# Altium PCB AD_STM32-PCB.PcbDoc
Units mm, origin at the board's own origin, x right, y up, seen from the top; angles counter-clockwise.
Board outline 43.8 x 30.7 mm, 2 copper layers (Top Layer, Bottom Layer), stack 1.671 mm thick; 30 components, 26 nets, 139 pads, 34 vias.
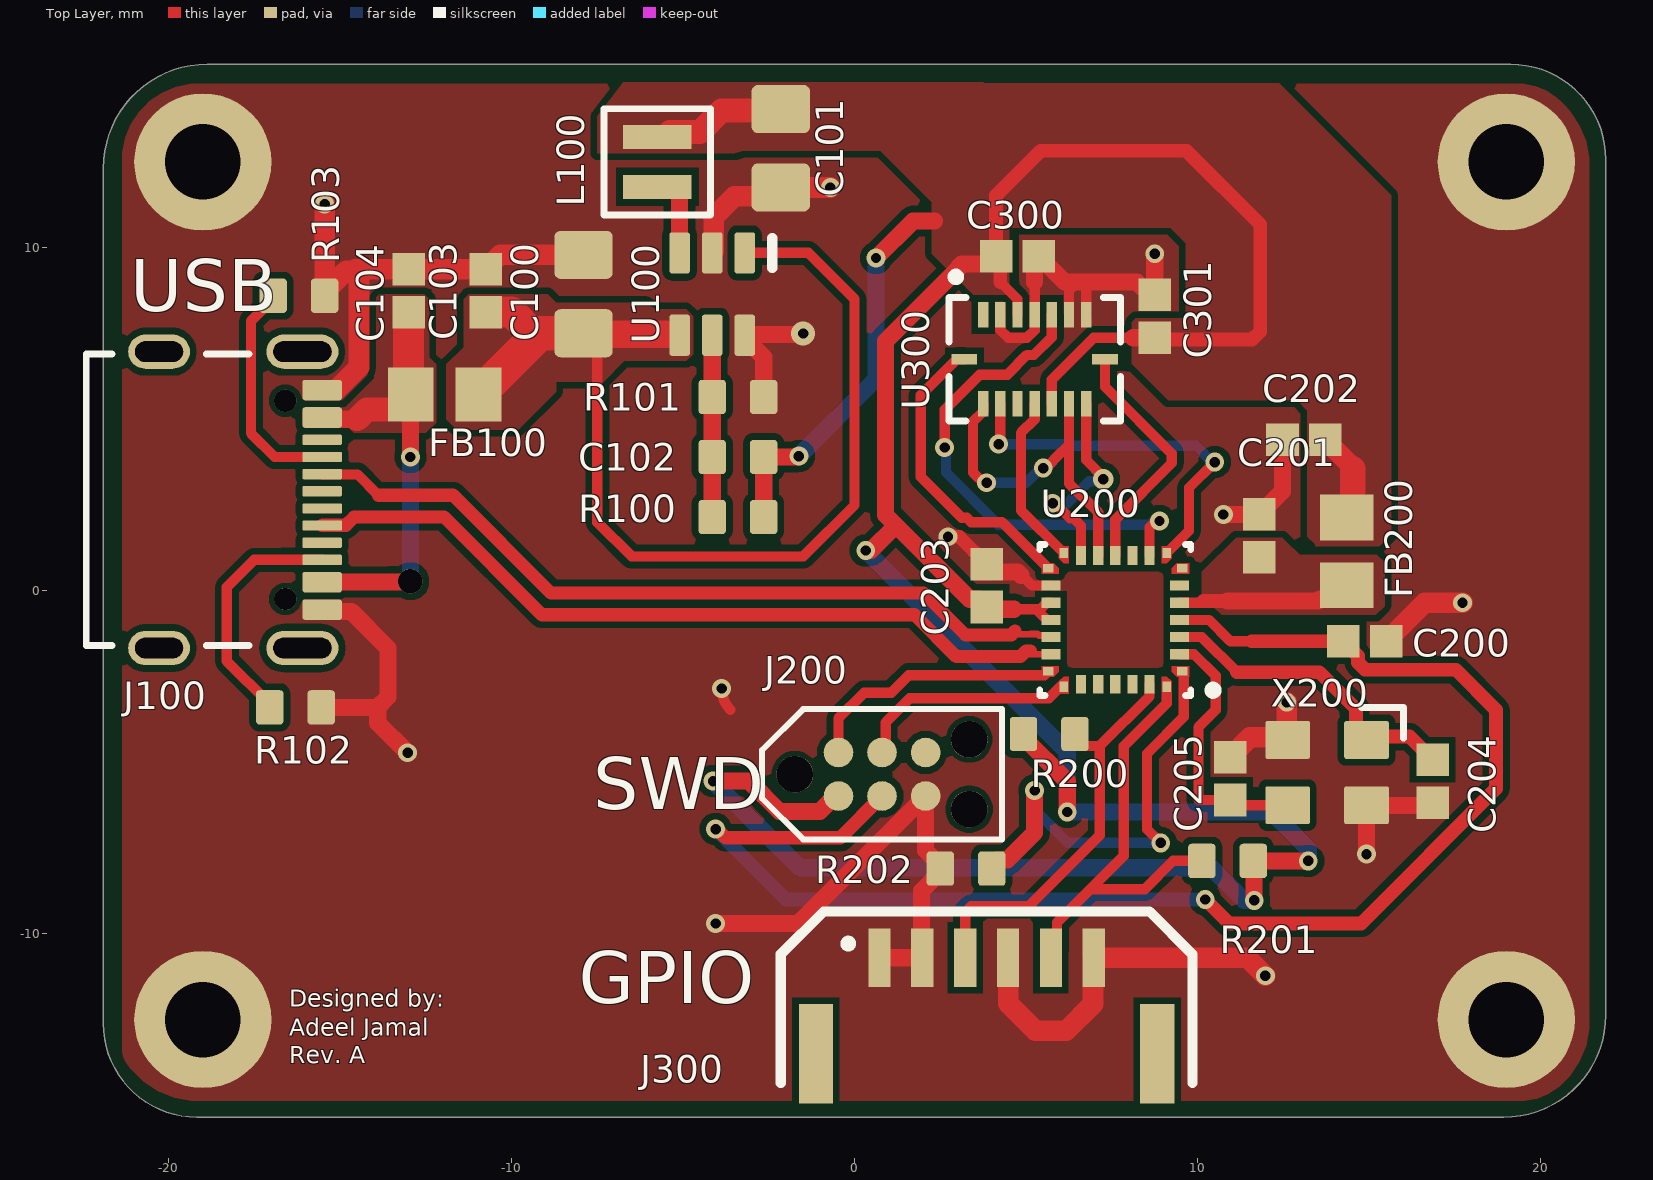
[diagram p0: Top Layer view]
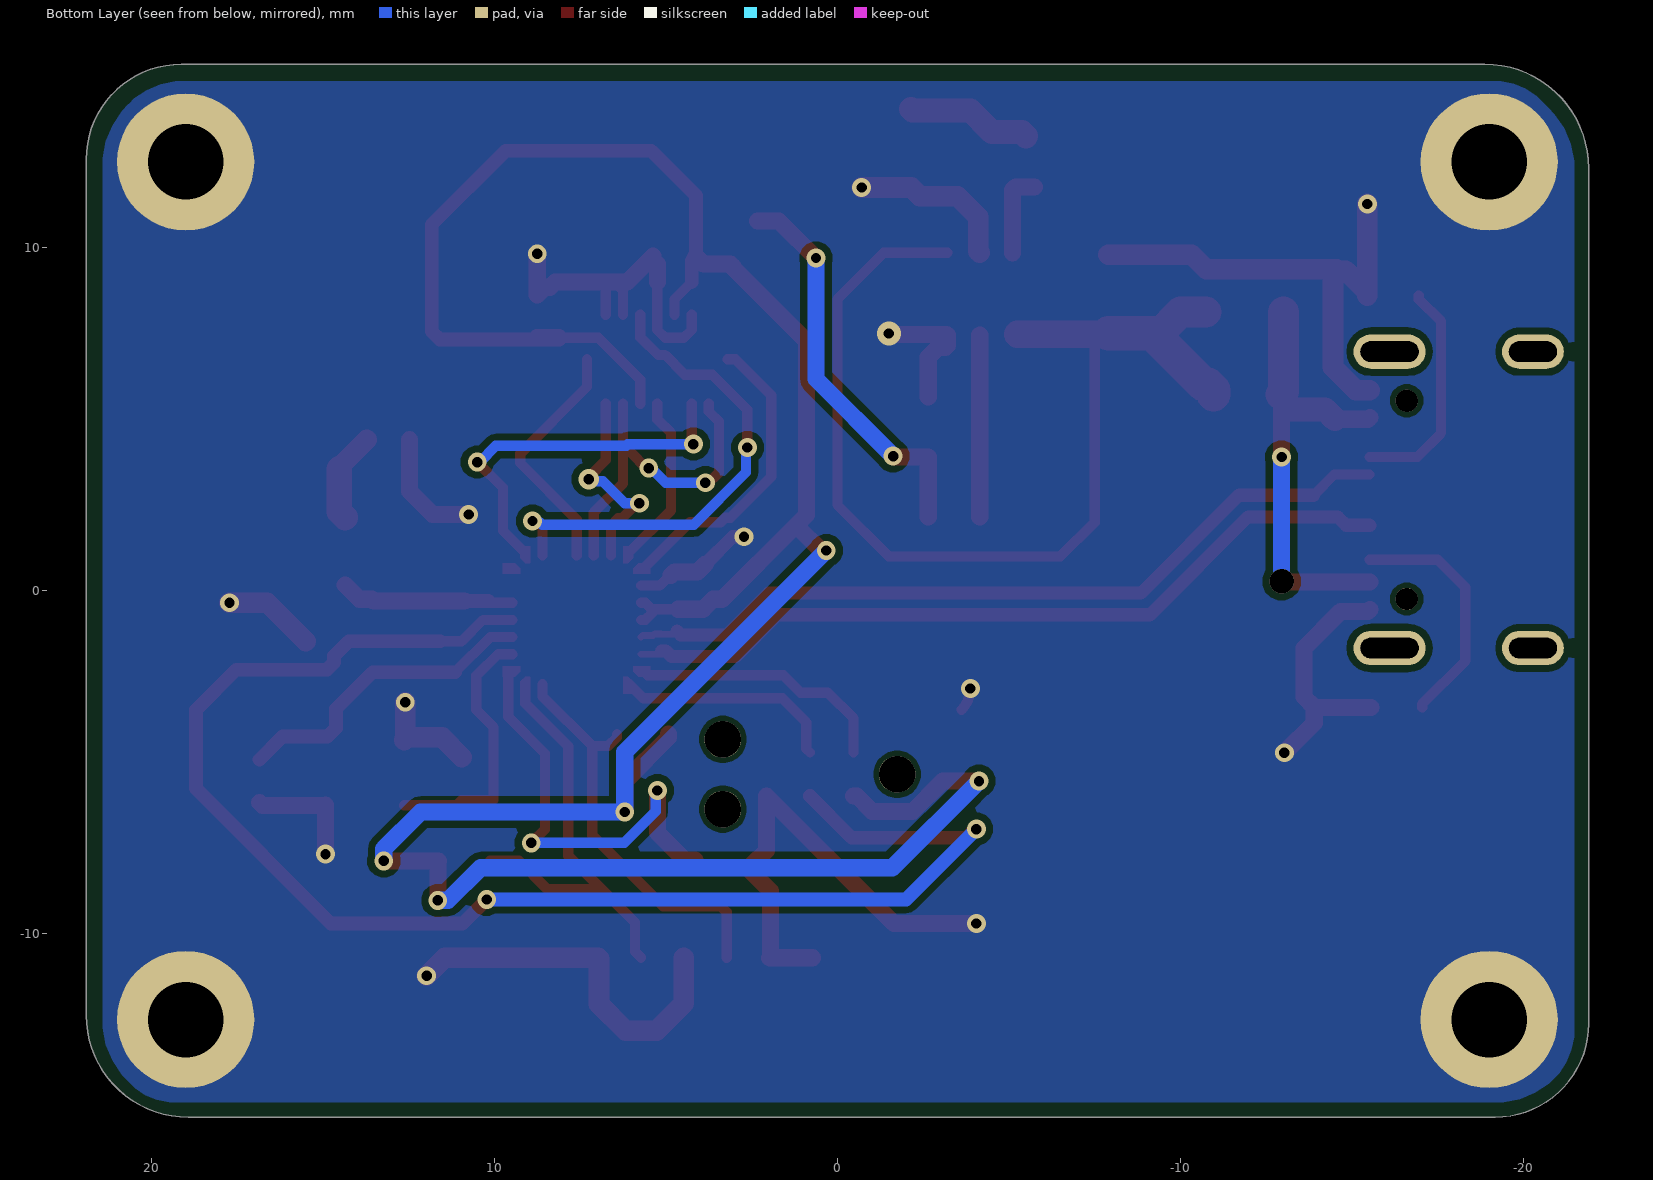
[diagram p1: Bottom Layer view, seen from below]
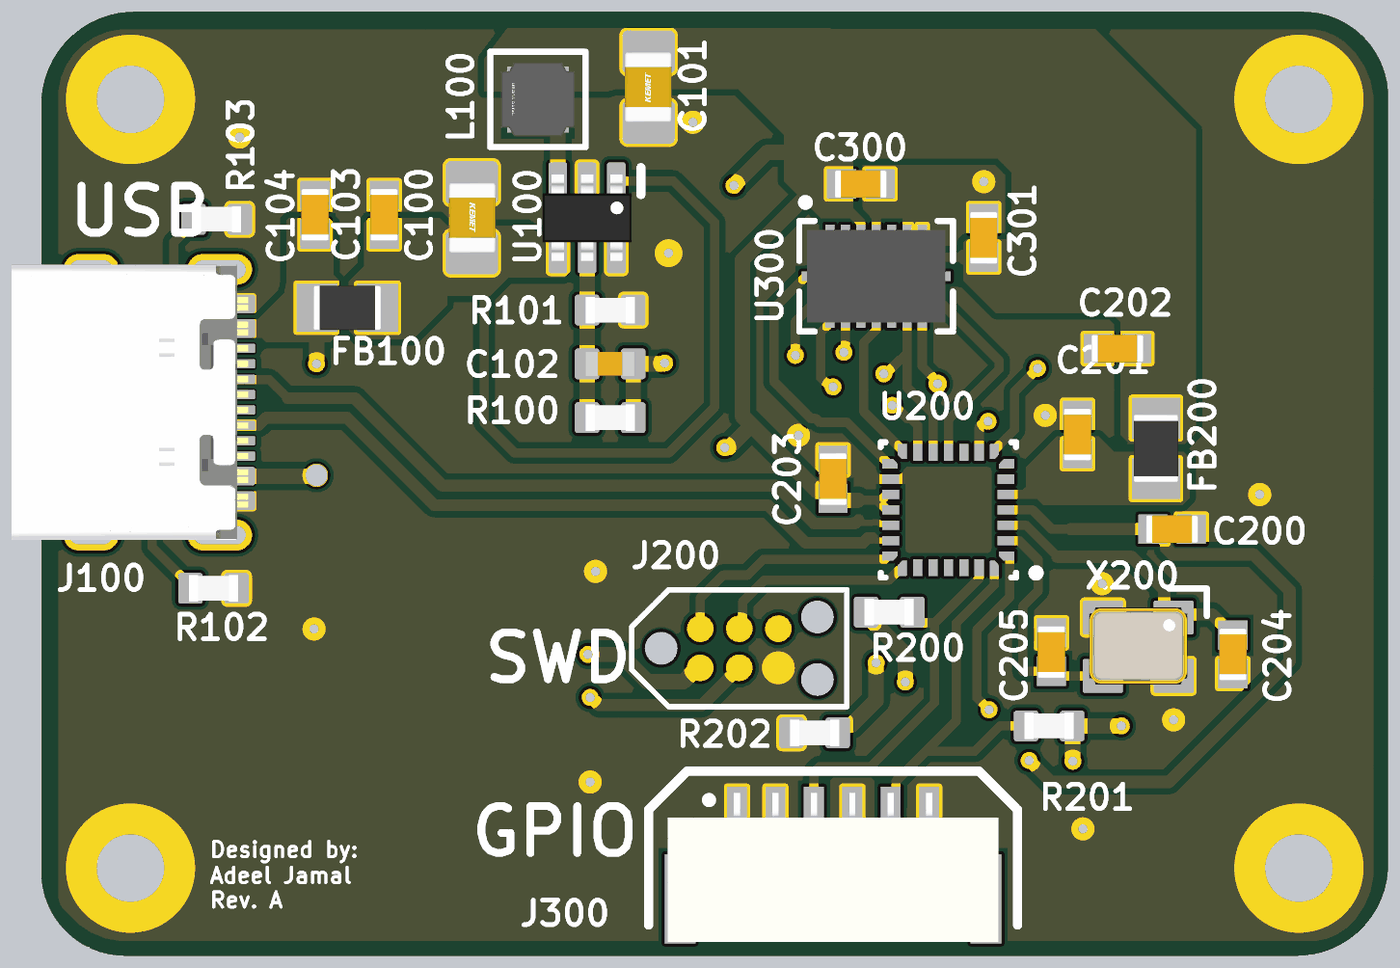
[diagram p2: 3D render of the assembled board from above, using the file's embedded part models]

## Layer stack, top to bottom
Top Solder: solder mask 0.0102, Solder Resist, Dk 3.5
Top Layer: signal copper 0.0356
Dielectric 1: dielectric 1.6, FR-4, Dk 4.6
Bottom Layer: signal copper 0.0356
Bottom Solder: solder mask 0.0102, Solder Resist, Dk 3.5

## Board outline
-21.9,-12.621 -21.9,12.321 cw(c-18.871,12.321) -18.871,15.35 19.126,15.35 cw(c19.126,12.576) 21.9,12.576 21.9,-12.371 cw(c18.921,-12.371) 18.921,-15.35 -19.171,-15.35 cw(c-19.171,-12.621)

## Design rules (kind name [scope] priority, off if disabled: settings)
Clearance [All] p1: gap=0.2 ignorepadtopadclearanceinfootprint=FALSE except(0: THPad-Hole Text-Hole; 0.15: Arc-SMDPad Arc-Hole Track-SMDPad Track-Hole SMDPad-SMDPad SMDPad-Hole Via-Hole Fill-Hole Poly-Hole Region-Hole; 0.3: Arc-THPad Track-THPad SMDPad-THPad THPad-THPad)
DiffPairsRouting [All] p1: maxlimit=0.254 minlimit=0.2 mostfreqgap=0.254 toplayer_minwidth=0.2 toplayer_maxwidth=0.381 toplayer_prefwidth=0.381 bottomlayer_minwidth=0.2 bottomlayer_maxwidth=0.381 bottomlayer_prefwidth=0.381 maxuncoupledlength=12.7
PolygonConnect [All] p1: connectstyle=Direct reliefconductorwidth=0.254 reliefentries=4 polygonreliefangle="90 Angle" airgapwidth=0.254
RoutingVias [All] p1: holewidth=0.3 width=0.7 viastyle="Through Hole" minholewidth=0.25 minwidth=0.55 maxholewidth=0.4 maxwidth=0.9
SolderMaskExpansion [All] p1: expansion=0.102 istentingtop=FALSE
UnRoutedNet [All] p1: checkbadconnections=TRUE
Width [All] p1: maxlimit=1 minlimit=0.15 preferedwidth=0.3 minimp=50.000000 maximp=50.000000 favimp=50.000000
28 further rules are at their usual default settings.

## Classes and differential pairs
differential pair USB_D: +USB_D_P -USB_D_N

## Components (designator, comment, footprint, x,y, rotation, side; value= is the part's Value field where it differs from the comment)
C100 "4u7" CAP_0805 -7.9,8.65 r270 top
C101 "4u7" CAP_0805 -2.15,12.9 r90 top
C102 "22pF" CAP_0603 -3.4,3.9 r0 top
C103 "Capacitor 100 nF +/-10% 50 V 0603" CAPC1608X90X40NL10T20 -10.75,8.75 r90 top value=100nF
C104 "Capacitor 100 nF +/-10% 50 V 0603" CAPC1608X90X40NL10T20 -13,8.75 r90 top value=100nF
C200 "Capacitor 100 nF +/-10% 50 V 0603" CAPC1608X90X40NL10T20 14.875,-1.475 r0 top value=100nF
C201 "Capacitor 100 nF +/-10% 50 V 0603" CAPC1608X90X40NL10T20 11.8,1.6 r90 top value=100nF
C202 "Capacitor 100 nF +/-10% 50 V 0603" CAPC1608X90X40NL10T20 13.1,4.4 r180 top value=100nF
C203 "Capacitor 100 nF +/-10% 50 V 0603" CAPC1608X90X40NL10T20 3.85,0.15 r90 top value=100nF
C204 "Capacitor 100 nF +/-10% 50 V 0603" CAPC1608X90X40NL10T20 16.85,-5.55 r270 top value=10pF
C205 "Capacitor 100 nF +/-10% 50 V 0603" CAPC1608X90X40NL10T20 10.95,-5.475 r90 top value=10pF
C300 "Capacitor 100 nF +/-10% 50 V 0603" CAPC1608X90X40NL10T20 4.75,9.75 r0 top value=100nF
C301 "Capacitor 100 nF +/-10% 50 V 0603" CAPC1608X90X40NL10T20 8.75,8 r90 top value=100nF
FB100 "120R" INDC2013X105X50ML20T20 -11.95,5.725 r0 top
FB200 "120R" INDC2013X105X50ML20T20 14.35,1.15 r270 top
J100 "USB4105-GF-A-060" USB4105-GF-A-060 -17.9,2.65 r270 top
J200 "TC2030-NL" TC2030-NL-FP 0.8,-5.35 r0 top
J300 "SM06B-GHS-TB" SM06B-GHS-TB 3.85,-12.1 r0 top
L100 "10u" FP-NRH2412-MFG -5.75,12.5 r90 top
R100 "887k" RES_0603 -3.4,2.15 r0 top
R101 "280k" RES_0603 -3.4,5.65 r180 top
R102 "5k1" RES_0603 -16.3,-3.4 r180 top
R103 "5k1" RES_0603 -16.2,8.6 r180 top
R200 "5k1" RES_0603 5.675,-4.175 r180 top
R201 "5k1" RES_0603 10.875,-7.875 r0 top
R202 "5k1" RES_0603 3.25,-8.1 r0 top
U100 "LTC3405ES6#TRMPBF" SOT-23-6 -4.15,8.65 r180 top
U200 "STM32F042G6U6" STM-UFQFPN28_V 7.6,-0.85 r180 top
U300 "BMI088" BMI088 5.25,6.75 r0 top
X200 "24MHz" XTAL_3225 13.775,-5.3 r180 top

## Footprints (in the part's own frame and the unit in brackets; to place one, negate y for a bottom-side part, rotate by r counter-clockwise, add the part's x,y. Pads: shape width x height; smd on the part's side, far side on the other; paste and mask are expansions set on the pad)
BMI088 [mm]
  rect 0.3x0.75 smd: 1(-1.5,1.3) 2(-1,1.3) 3(-0.5,1.3) 4(0,1.3) 5(0.5,1.3) 6(1,1.3) 7(1.5,1.3) 9(1.5,-1.3) 10(1,-1.3) 11(0.5,-1.3) 12(0,-1.3) 13(-0.5,-1.3) 14(-1,-1.3) 15(-1.5,-1.3)
  rect 0.75x0.3 smd: 8(2.05,0) 16(-2.05,0)
  silkscreen extent -2.5,-1.8 2.5,2.51, body extent -2.25,-1.5 2.25,1.5, height 1.01
CAP_0603 [mm]
  rrect25% 0.8x1 smd: 1(-0.75,0) 2(0.75,0)
  body extent -0.8,-0.4 0.8,0.4, height 0.51
CAP_0805 [mm]
  rrect25% 1.4x1.7 smd: 1(-1.143,0) 2(1.143,0)
  body extent -1.15,-0.76 1.15,0.79, height 1.01
CAPC1608X90X40NL10T20 [mm] "Chip Capacitor, 2-Leads, Body 1.70x0.90mm, IPC Medium Density"
  rect 0.95x0.95 smd: 1(-0.625,0) 2(0.625,0)
  body extent -0.85,-0.45 0.85,0.45, height 0.9
FP-NRH2412-MFG [mm]
  rect 0.7x2 smd paste+0 mask+0: 1(-0.725,0) 2(0.725,0)
  silkscreen extent -1.55,-1.55 1.55,1.55, body extent -1.35,-1.35 1.35,1.35, height 0.25
INDC2013X105X50ML20T20 [mm] "Chip Inductor, 2-Leads, Body 2.2x1.45mm, IPC Low Density"
  rect 1.33x1.57 smd: 1(-0.985,0) 2(0.985,0)
  body extent -1.1,-0.72 1.1,0.72, height 1.05
RES_0603 [mm]
  rrect25% 0.8x1 smd: 1(-0.75,0) 2(0.75,0)
  body extent -0.8,-0.43 0.8,0.43, height 0.52
SM06B-GHS-TB [mm]
  rect 0.65x1.7 smd: 1(-3.125,1.4) 2(-1.875,1.4) 3(-0.625,1.4) 4(0.625,1.4) 5(1.875,1.4) 6(3.125,1.4)
  rect 1x2.9 smd: ""(-4.975,-1.4) ""(4.975,-1.4)
  silkscreen extent -6,-2.25 6,2.75, body extent -5.38,-2.8 5.38,2.05, height 4.26
SOT-23-6 [mm]
  rrect25% 0.6x1.2 smd: 1(-0.95,-1.2) 2(0,-1.2) 3(0.95,-1.2) 4(0.95,1.2) 5(0,1.2) 6(-0.95,1.2)
  silkscreen extent -1.75,-1.63 -1.75,-0.76, body extent -1.45,-1.4 1.45,1.4, height 1.45
STM-UFQFPN28_V [mm] "QFN, 28-Leads, Body 4.1x4.1mm, Pitch 0.5mm"
  rect 0.3x0.25 smd: 1(-1.95,1.5) 7(-1.95,-1.5) 15(1.95,-1.5) 21(1.95,1.5)
  rect 0.55x0.3 smd: 2(-1.875,1) 3(-1.875,0.5) 4(-1.875,0) 5(-1.875,-0.5) 6(-1.875,-1) 16(1.875,-1) 17(1.875,-0.5) 18(1.875,0) 19(1.875,0.5) 20(1.875,1)
  rect 0.25x0.3 smd: 8(-1.5,-1.95) 14(1.5,-1.95) 22(1.5,1.95) 28(-1.5,1.95)
  rect 0.3x0.55 smd: 9(-1,-1.875) 10(-0.5,-1.875) 11(0,-1.875) 12(0.5,-1.875) 13(1,-1.875) 23(1,1.875) 24(0.5,1.875) 25(0,1.875) 26(-0.5,1.875) 27(-1,1.875)
  Top Layer region: 1.35,2.15 1.35,1.65 1.505,1.65 1.65,1.795 1.65,2.15
  Top Layer region: 2.15,-1.35 1.65,-1.35 1.65,-1.505 1.795,-1.65 2.15,-1.65
  Top Layer region: -2.15,1.35 -1.65,1.35 -1.65,1.505 -1.795,1.65 -2.15,1.65
  Top Layer region: 2.15,1.35 1.65,1.35 1.65,1.505 1.795,1.65 2.15,1.65
  Top Layer region: 1.35,-2.15 1.35,-1.65 1.505,-1.65 1.65,-1.795 1.65,-2.15
  Top Layer region: -1.35,2.15 -1.35,1.65 -1.505,1.65 -1.65,1.795 -1.65,2.15
  Top Layer region: -1.35,-2.15 -1.35,-1.65 -1.505,-1.65 -1.65,-1.795 -1.65,-2.15
  Top Layer region: -2.15,-1.35 -1.65,-1.35 -1.65,-1.505 -1.795,-1.65 -2.15,-1.65
  silkscreen extent -2.98,-2.2 2.2,2.2, body extent -2.05,-2.05 2.05,2.05, height 0.6
TC2030-NL-FP [mil]
  round 33.98 smd paste-16.99: 1(-50,-25) 2(-50,25) 3(0,-25) 4(0,25) 5(50,-25) 6(50,25)
  round 42.01 hole 42.01 unplated: MH(-100,0) MH(100,-40) MH(100,40)
  silkscreen extent -138,-75 138,75
USB4105-GF-A-060 [mm]
  rrect25% 0.6x1.15 smd mask+0.05: A1B12(-3.2,2.378) A4B9(-2.4,2.378) B1A12(3.2,2.378) B4A9(2.4,2.378)
  rrect25% 0.3x1.15 smd mask+0.05: A5(-1.25,2.378) A6(-0.25,2.378) A7(0.25,2.378) A8(1.25,2.378) B5(1.75,2.378) B6(0.75,2.378) B7(-0.75,2.378) B8(-1.75,2.378)
  round 0.65 hole 0.65 unplated mask+0.05: MH(-2.89,1.303) MH(2.89,1.303)
  oval 1x2.1 hole 0.6 slot 1.7 at 90 deg: SH(-4.32,1.803) SH(4.32,1.803)
  oval 1x1.8 hole 0.6 slot 1.4 at 90 deg: SH(-4.32,-2.377) SH(4.32,-2.377)
  silkscreen extent -4.25,-4.5 4.25,0.25, body extent -4.47,-4.97 4.47,2.73, height 3.27
XTAL_3225 [mm]
  rrect10% 1.3x1.1 smd: 1(-1.15,-0.95) 2(1.15,-0.95) 3(1.15,0.95) 4(-1.15,0.95)
  silkscreen extent -2.23,-1.89 -1,-1, body extent -1.6,-1.28 1.6,1.22, height 0.61

## Part data
C100 C101: library part CAP_0805, "Capacitor SMD 0805"
C102: library part CAP_0603, "Capacitor SMD 0603"
C103 C104 C200 C201 C202 C203 C204 C205 C300 C301: library part CMP-001-00017-6, "Chip Capacitor, 100 nF, +/- 10%, 50 V, 0603 (1608 Metric)", Capacitor Type=Ceramic, Case/Package=0603, Max Operating Temperature=125°C, Min Operating Temperature=-55°C, Tolerance=10%, Voltage Rating=50V, Mounting Technology=SM, Pins=2, RoHS Compliant=True
FB100 FB200: library part CMP-006-00000-3, "Chip Ferrite Bead, 120 Ohm,", Case/Package=0805, Current Rating=1.5A, Manufacturer=Murata, Max Operating Temperature=125°C, Min Operating Temperature=-55°C, Package Description="2-Pin Surface Mount Device, Body 2 x1.25 mm", Package Quantity=4000, Resistance=90mohm, Tolerance=25%, Core Material=Ferrite, Datasheet URL=http://psearch.en.murata.com/inductor/product/LQG15HS15NJ02_.pdf, Datasheet Version=Nov-11, Impedance=330Ohm, Max Current Rating=1.5A, Mounting Technology=SM, Package Reference=0805, Packaging=TapeandReel, RoHS Compliant=True
J100: "USB Connector Type C SMT 12 Pin", Manufacturer=GCT, Distributor Link=https://eu.mouser.com/ProductDetail/GCT/USB4105-GF-A-060?qs=QNEnbhJQKvY2mocwNJzgfA%3D%3D, Manufacturer Part Number=USB4105-GF-A-060
J200: "Tag-Connect No-Solder SWD Debug Connector (No Legs) DO NOT PLACE", Manufacturer=Tag-Connect, Manufacturer Part Number=TC2030-NL-FP
J300: "Header Connector 6 Position 1.25MM Pitch SMD Horizontal JST GH", Manufacturer=JST, Manufacturer Part Number=SM06B-GHS-TB
L100: library part CMP-14484-000582-1, "Shielded Wirewound Inductor 10uH 20% 0.51A 0.72Ω SMD", Case/Package=Nonstandard, Current Rating=450mA, DC Resistance (DCR)=600mR, Inductance=10uH, Max DC Current=810mA, Max Operating Temperature=120°C, Min Operating Temperature=-25°C, Package Quantity=2500, Self Resonant Frequency=29MHz, Test Frequency=100kHz, Tolerance=20%, Core Material=Ferrite, Halogen Free="Halogen Free", Height=1.2mm, Height - Seated (Max)=0.047inch, Length=0.095inch, Mount="Surface Mount", Packaging="Tape and Reel", RoHS Compliant=Yes, Saturation Current=810mA, Shielding=Shielded, Termination=SMD/SMT, Width=0.095inch
R100 R101 R102 R103 R200 R201 R202: library part RES_0603, "Resistor SMD 0603"
U100: "1.5MHz, 300mA / Synchronous Step-Down / Regulator in ThinSOT", Manufacturer="Analog Devices", Manufacturer Part Number=LTC3405ES6#TRMPBF
U200: library part CMP-0304-00112-2, "ARM Cortex-M0 32-bit MCU, 32 KB Flash, 6 KB Internal RAM, 24 I/Os, 28-Pin UFQFPN, -40 to 85 degC, Tray", I/Os (High Current)=24, Manufacturer=STMicroelectronics, Operating Frequency(F) (Processor speed) (MHz)=48, Package Description="28-Pin Ultra Thin Fine Pitch Quad Flat No-Lead, 4 x 4 x 0.6 mm Body, 0.5 mm Pitch", Package Reference=UFQFPN28, Supply Voltage(Vcc) min (V)=2, ComponentLink1Description="Manufacturer URL", ComponentLink1URL=http://www.st.com/, ComponentLink2Description=Datasheet, ComponentLink2URL=http://www.st.com/st-web-ui/static/active/en/resource/technical/document/datasheet/DM00105814.pdf, Core="ARM Cortex-M0", DatasheetVersion="Rev. 5", FLASH Size (Prog) (kB)=32, Internal RAM Size (kB)=6, Mounting Technology="Surface Mount", Packing=Tray, PartNumber=STM32F042G6U6
U300: "Inertial Measurement Unit IMU 6-Axis LGA", Manufacturer=Bosch, Manufacturer Part Number=BMI088
X200: library part TSX-3225_24.0000MF15X-AC, "Crystal SMD 24MHz 10PPM 7pF 3225", Manufacturer=Epson, Manufacturer Part Number="TSX-3225 24.0000MF15X-AC"

## Free pads (board coordinates)
  round 4 hole 2.2: MH(19,12.5) MH1(19,-12.5) MH2(-19,-12.5) MH3(-19,12.5)

## Via types
v1: diameter 0.55, hole 0.3, Top Layer to Bottom Layer, 31 vias
v2: diameter 0.711, hole 0.711, Top Layer to Bottom Layer, 1 vias
v3: diameter 0.6, hole 0.3, Top Layer to Bottom Layer, 1 vias
v4: diameter 0.7, hole 0.3, Top Layer to Bottom Layer, 1 vias

## Nets (pads, with @x,y where several pads share a name; then routed paths per layer and width w, separated by ;. In a path a pad name is that pad's centre, name@x,y a point inside that pad or via, vN(x,y) a via of type N, cw(c..) or ccw(c..) an arc to the next point about the centre after c; other vN are vias at no path point)
+3V3: C101.2 C102.2 C202.1 C203.1 C300.1 C301.1 FB200.1 J200.1 L100.2 R100.2 R200.2 R201.2 U200.17 U200.18 U300.3 U300.11 | length 103.4
  Top Layer w0.3: 4.25,9 4.75,8.5 U300.3 ; 4.65,-0.538 5.288,-0.538 ; U200.18 5.6,-0.85 5.413,-0.663 5.288,-0.538 ; U200.17 5.6,-0.35 5.412,-0.538 5.288,-0.538 ; U300.11 5.75,6.149 6.976,7.375 8.125,7.375
  Top Layer w0.4: 4.25,9 4.25,9.625 C300.1 4.125,11.525 5.425,12.825 9.675,12.825 11.825,10.675 11.825,7.559 11.591,7.325 8.8,7.325 C301.1
  Top Layer w0.5: v1(-4.125,-5.55) -3.072,-5.55 -2.189,-6.433 -1.017,-6.433 -0.568,-5.985 J200.1 ; R100.2 C102.2 -1.664,3.9 -1.639,3.925 v1(-1.625,3.925) ; v1(0.325,1.175) 0.475,1.175 1.205,1.905 ; v1(0.625,9.7) 1.7,10.775 2.325,10.775 ; C300.1 3.9,9.525 3.118,9.525 3.05,9.457 3.05,9.425 0.9,7.275 0.9,2.209 1.205,1.905 ; 4.65,-0.538 3.913,-0.538 C203.1 3.625,-0.25 3.359,-0.25 1.205,1.905 ; R200.2 4.925,-4.275 6.2,-5.55 v1(6.2,-6.45) ; 8.125,7.375 C301.1 ; v1(11.65,-9.025) 11.64,-9.015 11.64,-7.89 R201.2 v1(13.225,-7.875)
  Top Layer w0.6: C202.1 14.525,3.6 14.525,3.55
  Top Layer w0.7: L100.2@-5.5,13.25 -5.375,13.375 -4.5,13.375 -3.875,14 -2.193,14 C101.2
  Top Layer w0.75: FB200.1 14.525,2.31 14.525,3.55
  Bottom Layer w0.5: v1(-4.125,-5.55) -1.6,-8.075 10.4,-8.075 11.35,-9.025 v1(11.65,-9.025) ; v1(-1.625,3.925) 0.625,6.175 v1(0.625,9.7) ; v1(0.325,1.175) 6.2,-4.7 v1(6.2,-6.45) 12.15,-6.45 13.225,-7.525 v1(13.225,-7.875)
+5V: C100.2 C103.1 FB100.2 U100.1 U100.4 | length 32
  Top Layer w0.3: C100.2 -7.871,7.478 -7.5,7.107 -7.5,2 -6.5,1 -1.5,1 0,2.5 0,8.5 -1.35,9.85 U100.1
  Top Layer w0.8: C100.2@-7.871,7.478 U100.4@-5.25,7.478
  Top Layer w0.9: C103.1 -10.001,8.125 -9.383,7.507
  Top Layer w1: FB100.2 -10.965,5.845 -10.8,6.01 -10.68,6.01 -9.383,7.307 ; -9.383,7.507 C100.2
+VUSB: C104.1 FB100.1 J100.A4B9 J100.B4A9 | length 12.6
  Top Layer w0.5: J100.B4A9 -13.6,0.25 v2@-13.2,0.25 ; J100.A4B9 -15.473,5 -14.5,5 ; v1(-12.95,3.9) -12.942,3.908 -12.942,5.717 FB100.1
  Top Layer w0.7: -14.5,5 -14.21,5.29 FB100.1@-13.25,5.29
  Top Layer w0.9: C104.1 -13,5.79 FB100.1
  Bottom Layer w0.5: v2(-12.95,0.275) v1(-12.95,3.9)
BOOT0: R202.2 U200.1 | length 13.1
  Top Layer w0.3: v1(8.925,-7.35) 8.525,-6.95 8.525,-4.75 9.6,-3.675 9.6,-2.4 U200.1
  Top Layer w0.5: R202.2@4.15,-8.061 4.15,-7.85 4.45,-7.85 5.25,-7.05 v1(5.25,-5.825)
  Bottom Layer w0.3: v1(5.25,-5.825) 5.298,-5.873 5.298,-6.432 6.216,-7.35 v1(8.925,-7.35)
BUCK_SW: L100.1 U100.3 | length 2.5
  Top Layer w0.5: L100.1 -5.2,11.775 -5.1,11.675 U100.3
BUCK_VFB: C102.1 R100.1 R101.2 U100.5 | length 5.3
  Top Layer w0.5: R100.1 C102.1 R101.2 U100.5
GND: C100.1 C101.1 C103.2 C104.2 C200.2 C201.2 C202.2 C203.2 C204.2 C205.2 C300.2 C301.2 J100.A1B12 J100.B1A12 J200.5 J300.1 J300.2 J300.4 J300.6 pad.MH pad.MH1 pad.MH2 pad.MH3 R101.1 R102.1 R103.1 R202.1 U100.2 U100.6 U200.16 U300.2 U300.4 U300.6 U300.7 X200.2 X200.4 | length 83.7
  Top Layer w0.3: v1(-3.875,-2.85) ccw(c-2.994,-2.85) -3.617,-3.473 ; U300.2 4.25,7.601 4.476,7.375 5.024,7.375 5.25,7.601 U300.4 5.25,9 ; 4.875,0.45 5.175,0.15 U200.16 ; U300.6 6.25,8.75 6.499,8.999 ; U300.7 6.75,8.974 6.775,8.999
  Top Layer w0.4: v1(2.725,1.575) 3.05,1.575 C203.2
  Top Layer w0.5: R102.1 -13.9,-3.4 ; J100.B1A12 -15.472,-0.6 -14.675,-0.6 -13.6,-1.675 -13.6,-3.1 -13.9,-3.4 ; v1(-13.03,-4.724) -13.9,-3.854 -13.9,-3.4 ; v1(-4.05,-9.7) -1.645,-9.7 J200.5 2.07,-7.57 2.5,-8 R202.1 2.5,-8.2 1.95,-8.75 1.95,-10.675 J300.2 J300.1 ; R101.1 -2.65,6.807 -2.943,7.1 -3.15,7.1 -3.2,7.15 U100.6 -3.175,7.475 -1.525,7.475 v4(-1.5,7.5) ; C203.2 4.075,0.55 4.75,0.55 4.85,0.45 ; 5.25,9 C300.2@5.25,9.525 ; C300.2 6.126,8.999 6.499,8.999 6.775,8.999 8.232,8.999 8.381,8.85 8.525,8.85 C301.2 v1(8.75,9.825) ; v1(10.75,2.225) C201.2 12.475,2.9 C202.2 ; v1(14.925,-7.679) 14.925,-7.525 X200.4@14.925,-6.262 ; X200.4 X200.4@14.925,-6.262 ; C204.2 16.762,-6.262 X200.4@14.925,-6.262
  Top Layer w0.6: J100.A1B12 -15.112,5.85 -14.447,6.514 -14.447,9.173 -14.6,9.325 ; R103.1 R103.1@-15.45,8.7 ; v1(-15.45,11.275) R103.1@-15.45,8.7 ; C100.1 -10.332,9.793 C103.2 C104.2 -14.55,9.375 -14.6,9.325 ; U100.2 -4.1,9.9 -4.1,10.9 -3.5,11.5 -2.407,11.5 C101.1 v1(-0.707,11.757) ; J300.4 4.475,-12.025 5.275,-12.825 6.174,-12.825 6.95,-12.049 6.95,-10.725 J300.6 11.45,-10.7 v1(11.975,-11.225) ; C205.2 11.525,-4.275 12.55,-4.275 X200.2@12.6,-4.325 ; v1(12.6,-3.25) X200.2@12.6,-4.325 ; X200.2 X200.2@12.6,-4.325 ; C200.2 16.625,-0.35 v1(17.725,-0.35) ; R103.1@-15.45,8.7 -14.825,9.325 -14.6,9.325
I2C_SCL: J300.3 R200.1 U200.27 | length 12.1
  Top Layer w0.3: J300.3 3.225,-9.376 3.401,-9.2 5.074,-9.2 7.15,-7.124 7.15,-4.524 ; R200.1 6.425,-4.274 6.675,-4.524 7.15,-4.524 ; U200.27 8.6,-3.074 7.15,-4.524
I2C_SDA: J300.5 R201.1 U200.28 | length 12.9
  Top Layer w0.3: J300.5 5.9,-10.525 5.9,-9.675 6.875,-8.7 ; U200.28 9.1,-3.281 7.85,-4.531 7.85,-7.725 6.875,-8.7 ; R201.1 9.284,-7.875 8.459,-8.7 6.875,-8.7
IMU_INT1: U200.15 U300.16 | length 8.9
  Top Layer w0.3: U300.16 2.975,6.75 1.925,5.7 1.925,3.325 3.125,2.125 3.278,2.125 3.403,2 4.3,2 U200.15
IMU_INT2: U200.14 U300.12 | length 5
  Top Layer w0.3: U300.12 5.25,5.001 4.85,4.601 4.85,2.35 U200.14
IMU_MISO: U200.12 U300.10 U300.15 | length 10.3
  Top Layer w0.3: U300.15 3.75,5.225 3.45,4.925 3.45,3.451 3.626,3.275 3.657,3.275 3.782,3.15 v1(3.85,3.15) ; v1(5.5,3.575) 5.568,3.575 6.031,4.038 6.038,4.038 6.25,4.25 ; U300.10 6.25,4.25 ; U200.12 7.1,2.284 6.25,3.134 6.25,4.25
  Bottom Layer w0.3: v1(3.85,3.15) 5.007,3.15 5.432,3.575 v1(5.5,3.575)
IMU_MOSI: U200.13 U300.9 | length 6.1
  Top Layer w0.3: v1(5.775,2.55) 5.843,2.55 6.281,2.112 6.388,2.112 6.6,1.9 U200.13 ; U300.9 6.75,3.811 7.25,3.311 v3(7.25,3.25)
  Bottom Layer w0.3: v1(5.775,2.55) 6.2,2.55 6.845,3.195 7.195,3.195 v3(7.25,3.25)
IMU_NCS_ACC: U200.8 U300.14 | length 10.9
  Top Layer w0.3: v1(4.2,4.275) 4.2,4.343 4.25,4.393 U300.14 ; U200.8 9.75,1.75 9.75,3 v1(10.5,3.75)
  Bottom Layer w0.3: v1(4.2,4.275) 6.109,4.275 6.159,4.225 9.957,4.225 10.432,3.75 v1(10.5,3.75)
IMU_NCS_GYR: U200.9 U300.5 | length 14.6
  Top Layer w0.3: v1(2.625,4.175) 2.625,5.274 3.651,6.3 4.449,6.3 5.024,6.875 5.231,6.875 5.75,7.394 U300.5 ; U200.9 8.6,1.85 8.781,2.031 v1(8.889,2.031)
  Bottom Layer w0.3: v1(2.625,4.175) 2.666,4.134 2.666,3.45 4.191,1.925 8.606,1.925 8.665,1.983 8.841,1.983 v1(8.889,2.031)
IMU_SCK: U200.11 U300.8 | length 7.2
  Top Layer w0.3: U300.8 7.3,5.95 9.25,4 9.25,3.725 7.6,2.075 U200.11
NRST: C200.1 J200.3 U200.4 | length 43.7
  Top Layer w0.3: U200.4 9.947,-0.85 10.332,-0.85 10.957,-1.475 11.575,-1.475
  Top Layer w0.4: v1(-4.05,-6.95) -4.009,-6.95 -3.759,-7.2 -2.342,-7.2 -0.415,-7.2 J200.3 ; v1(10.225,-9) 10.925,-9.7 14.77,-9.7 18.7,-5.77 18.7,-3.475 17.525,-2.3 14.88,-2.3 14.675,-2.095 14.675,-1.9 C200.1 11.575,-1.475
  Bottom Layer w0.4: v1(-4.05,-6.95) -2,-9 v1(10.225,-9)
OSC_IN: C205.1 U200.2 X200.3 | length 7.8
  Top Layer w0.3: U200.2 9.895,-1.85 10.526,-2.482 10.526,-3.474 10.025,-3.976 10.025,-6.1 C205.1 11.1,-6.25 X200.3
OSC_OUT: C204.1 U200.3 X200.1 | length 9.2
  Top Layer w0.3: U200.3 10.125,-1.35 11.15,-2.375
  Top Layer w0.4: 11.15,-2.375 13.55,-2.375 14.617,-3.442 14.617,-4.005 X200.1@14.862,-4.25 ; X200.1@14.875,-4.25 16.175,-4.25 C204.1
SWCLK: J200.4 U200.22 | length 6.5
  Top Layer w0.3: J200.4 0.908,-4.607 0.908,-3.839 1.611,-3.136 5.664,-3.136 6,-2.8 U200.22
SWDIO: J200.2 U200.21 | length 7.7
  Top Layer w0.3: J200.2 -0.47,-3.72 0.279,-2.971 1.068,-2.971 1.577,-2.462 5.538,-2.462 U200.21
USB_CC1: J100.A5 R103.2 | length 6.6
  Top Layer w0.3: R103.2 -16.95,8.5 -17.597,7.853 -17.597,4.597 -16.9,3.9 J100.A5
USB_CC2: J100.B5 R102.2 | length 7.1
  Top Layer w0.3: R102.2 -17.05,-3.3 -18.3,-2.05 -18.3,0.1 -17.5,0.9 -16.724,0.9 J100.B5
USB_D_N: J100.B7 U200.19 | length 23.4
  Top Layer w0.2: 4.675,-1.179 4.675,-1.269 5.124,-1.269 5.133,-1.26 5.331,-1.26 5.378,-1.306 5.681,-1.306 U200.19
  Top Layer w0.3: J100.B7@-15.513,3.39 -14.49,3.39 -13.885,2.785
  Top Layer w0.381: -13.885,2.785 -11.704,2.785 -8.854,-0.065 2.008,-0.065 3.234,-1.291 4.466,-1.291 4.47,-1.286 4.567,-1.286 4.675,-1.179
USB_D_P: J100.B6 U200.20 | length 23.1
  Top Layer w0.2: 5.124,-1.76 5.214,-1.85 U200.20
  Top Layer w0.381: J100.B6 -15.513,1.909 -14.828,1.909 -14.588,2.15 -13.885,2.15 -11.967,2.15 -9.117,-0.7 1.745,-0.7 2.967,-1.921 4.83,-1.921 4.992,-1.76 5.124,-1.76
VDDA: C201.1 FB200.2 U200.5 | length 5.1
  Top Layer w0.3: U200.5 10.125,-0.35 10.175,-0.3
  Top Layer w0.4: 10.175,-0.3 10.875,-0.3
  Top Layer w0.5: 10.875,-0.3 13.522,-0.3 13.572,-0.25 13.935,-0.25 FB200.2
pads on no net: J100.A6 J100.A7 J100.A8 J100.B8 J100.MH J100.SH J200.6 J200.MH J300. U200.6 U200.7 U200.10 U200.23 U200.24 U200.25 U200.26 U300.1 U300.13

## Polygon pours and split planes (outlines as drawn)
GND on Top Layer "GND_L01_P011" (solid, pour order 11): -21.35,12.556 cw(c-19.131,12.556) -20.7,14.125 cw(c-19.131,12.556) -19.131,14.775 19.333,14.775 cw(c19.333,12.983) 20.6,14.25 20.674,14.176 cw(c18.86,12.362) 21.425,12.362 21.425,-12.514 cw(c18.864,-12.514) 20.675,-14.325 cw(c19.347,-12.997) 19.347,-14.875 -19.1,-14.875 cw(c-19.1,-12.34) -20.892,-14.133 -21.125,-13.9 cw(c-20.582,-13.357) -21.35,-13.357 -21.35,9.375
VDDA on Top Layer "VDDA_L01_P008" (solid, pour order 8): 11.2,1.575 11.175,1.575 12.45,1.575 12.975,1.05 15.225,1.05 15.45,0.825 15.45,-0.45 15.2,-0.7 10.7,-0.7 10.475,-0.475 10.125,-0.475 10.125,0.55 11.15,1.575
+3V3 on Top Layer "+3V3_L01_P007" (solid, pour order 7): 8.075,7.825 8.2,7.95 12.9,7.95 15.65,5.2 15.65,1.65 15.3,1.3 13.425,1.3 13.425,1.35 13.2,1.575 13.2,5.25 12.9,5.55 9.15,5.55 8.075,6.625
+VUSB on Top Layer "+VUSB_L01_P006" (solid, pour order 6): -13.45,8.65 -13.5,8.6 -13.45,8.65 -12.55,8.65 -12.4,8.5 -12.4,6.8 -12.2,6.6 -12.2,4.9 -12.5,4.6 -14.6,4.6 -14.75,4.75 -16.1,4.75 -16.1,5.35 -14.85,5.35 -14,6.2 -14,8.5 -13.85,8.65
+5V on Top Layer "+5V_L01_P005" (solid, pour order 5): -5.8,8.2 -4.9,8.2 -4.7,8 -4.7,6.9 -4.9,6.7 -6.716,6.7 -7.316,6.1 -8.7,6.1 -8.7,5.8 -9.8,4.7 -11.6,4.7 -11.9,5 -11.9,6.6 -11.4,7.1 -11.4,8.5 -11.25,8.65 -8.95,8.65 -8.7,8.4 -6.1,8.4
+3V3 on Top Layer "+3V3_L01_P001" (solid, pour order 1): 3.754,14.826 3.78,14.8 12.375,14.8 15.65,11.525 15.65,5.2 13.95,5.2 11.55,7.6 9.65,7.6 9.65,10.125 9.199,10.576 4.504,10.576 4.504,8.576 3.504,8.576 2.254,9.826 2.254,11.326 0.754,12.826 -3.246,12.826 -3.5,12.75 -7.496,12.75 -7.496,13.826 -6.746,14.826
GND on Bottom Layer "GND_L02_P009" (solid, pour order 9): -20.724,14.076 -20.502,14.298 cw(c-19.172,12.972) -19.172,14.85 19.081,14.85 cw(c19.081,12.631) 20.65,14.2 20.674,14.176 cw(c18.861,12.363) 21.425,12.362 21.425,-12.487 cw(c18.86,-12.488) 20.674,-14.301 20.6,-14.375 cw(c19.304,-13.08) 19.304,-14.912 -19.182,-14.912 cw(c-19.182,-12.482) -20.9,-14.2 cw(c-19.512,-12.812) -21.475,-12.812 -21.475,12.262 cw(c-18.91,12.262)

## Silkscreen, mask and mechanical layers (free items; w line width, h text height)
Top Overlay:
  text "USB" at -21.121,8.154 h1.52
  text "SWD" at -7.621,-6.371 h1.52
  text "GPIO" at -8.046,-12.021 h1.52
  text "Designed by:" at -16.475,-12.133 h0.5
  text "Adeel Jamal" at -16.475,-12.975 h0.5
  text "Rev. A" at -16.475,-13.775 h0.5
Mechanical 1:
  lines w0.254: -21.9,-12.621 ccw(c-19.171,-12.621) -19.171,-15.35 18.921,-15.35 ccw(c18.921,-12.371) 21.9,-12.371 21.9,12.576 ccw(c19.126,12.576) 19.126,15.35 -18.871,15.35 ccw(c-18.871,12.321) -21.9,12.321 -21.9,9.85 -21.9,-12.621